# Altium PCB sensor rev.PcbDoc
Units mm, origin at the board's own origin, x right, y up, seen from the top; angles counter-clockwise.
Board outline 152.4 x 101.6 mm, 2 copper layers (Top Layer, Bottom Layer); 37 components, 41 nets, 165 pads, 0 vias.
Unrouted connection lines stored in the file: 10.
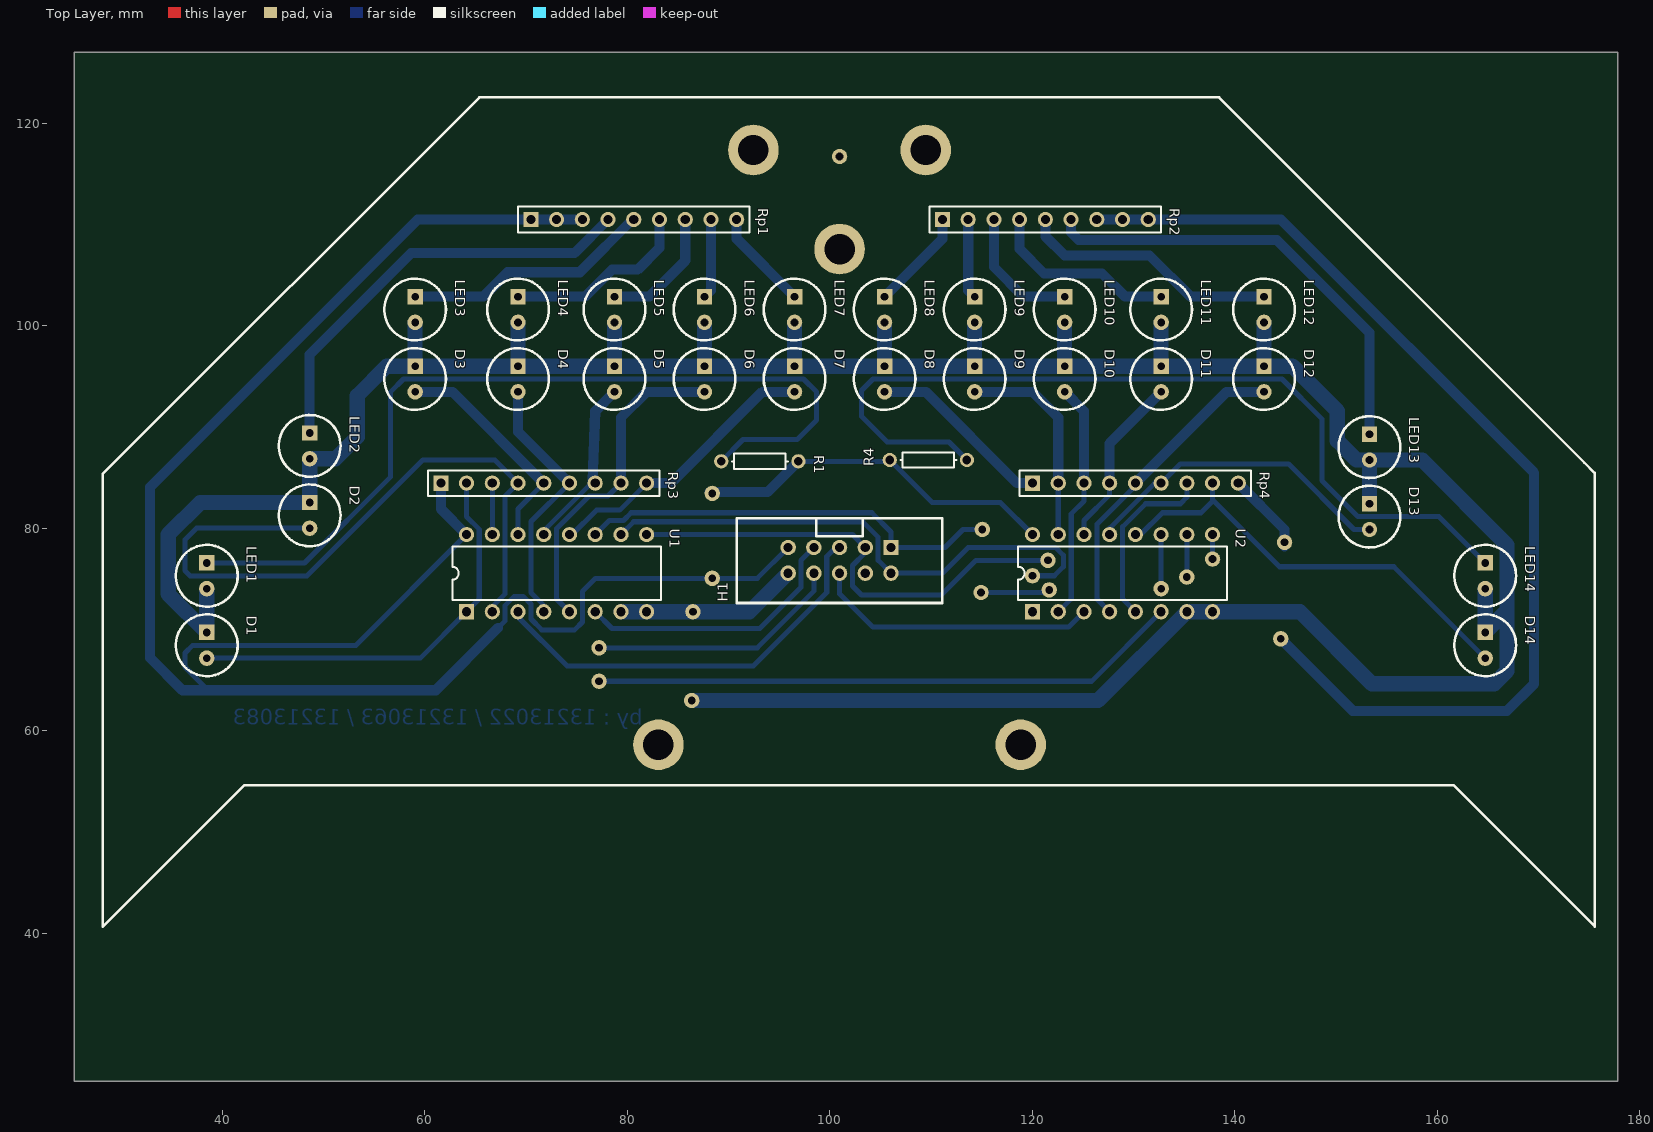
[diagram p0: Top Layer view]
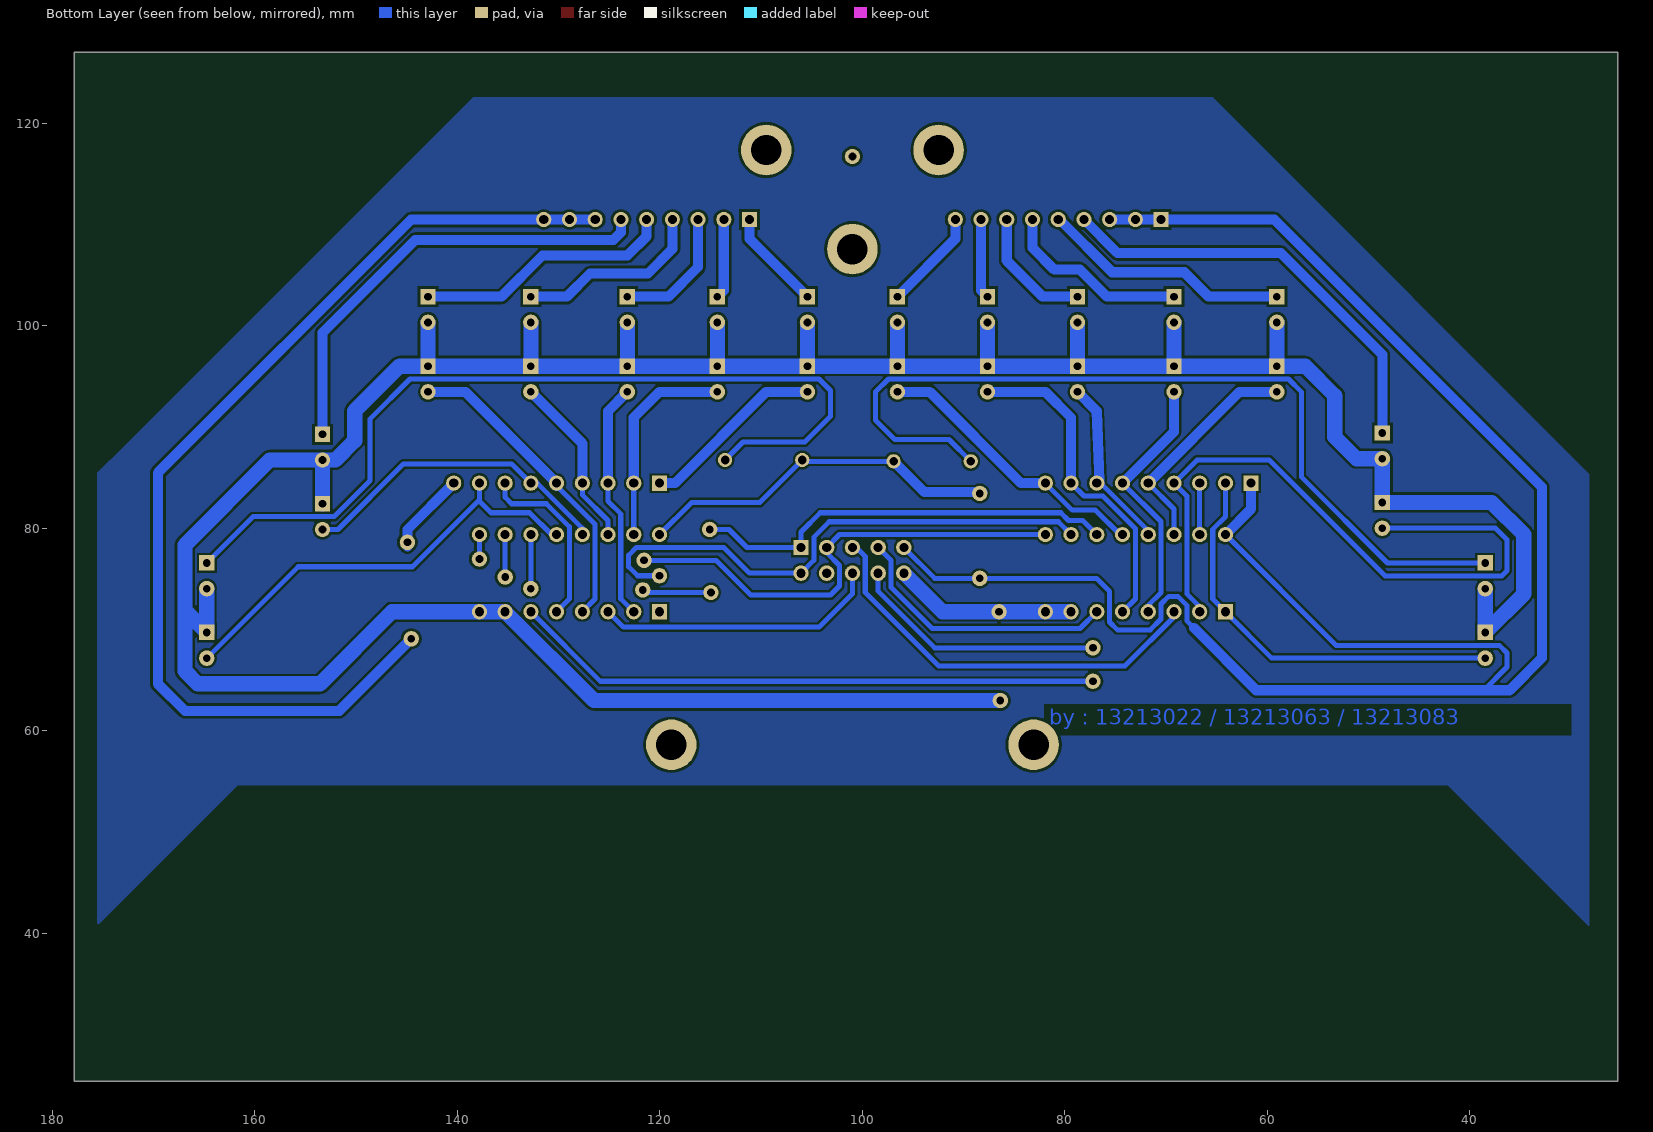
[diagram p1: Bottom Layer view, seen from below]

## Layer stack, top to bottom
Top Solder: solder mask 0.0102, Solder Resist, Dk 3.5
Top Layer: signal copper 0.0356
Dielectric1: dielectric 0.32, FR-4, Dk 4.8
Bottom Layer: signal copper 0.0356
Bottom Solder: solder mask 0.0102, Solder Resist, Dk 3.5

## Board outline
25.4,25.4 177.8,25.4 177.8,127 25.4,127

## Design rules (kind name [scope] priority, off if disabled: settings)
Clearance [All] p1: gap=0.25
PolygonConnect [All] p1: connectstyle=Relief reliefconductorwidth=0.254 reliefentries=4 polygonreliefangle="90 Angle" airgapwidth=0.254
RoomDefinition "sensor v2" [InComponentClass('sensor v2')] p1: confinementstyle=ConfineIn formatcopy=TRUE lockcomponents=FALSE outline 24.257,27.813 180.086,27.813 180.086,124.46 24.257,124.46
RoutingLayers [All] p1: top layer_v5=FALSE bottom layer_v5=TRUE
RoutingVias [All] p1: holewidth=0.711 width=1.27 viastyle="Through Hole" minholewidth=0.711 minwidth=1.27 maxholewidth=0.711 maxwidth=1.27
SilkToSolderMaskClearance SilkscreenOverComponentPads [IsPad] p1: minsilkscreentomaskgap=0.254 clearancetoexposedcopper=TRUE
SolderMaskExpansion [All] p1: expansion=0.102
Width [All] p1: maxlimit=5 minlimit=0.254 preferedwidth=0.4
28 further rules are at their usual default settings.

## Classes and differential pairs
component class "sensor v2": D2 D3 D4 D5 D6 D7 D8 D9 D10 D11 D12 D13 H1 LED2 LED3 LED4 LED5 LED6 LED7 LED8 LED9 LED10 LED11 LED12 LED13 Rp1 Rp2 Rp3 Rp4 U1 U2

## Components (designator, comment, footprint, x,y, rotation, side; value= is the part's Value field where it differs from the comment)
D1 "LED sedang" "LED sedang" 38.481,64.64 r270 top
D2 "LED sedang" "LED sedang" 48.641,77.467 r270 top (schematic designator D3)
D3 "LED sedang" "LED sedang" 59.055,90.929 r270 top (schematic designator D4)
D4 "LED sedang" "LED sedang" 69.215,90.929 r270 top (schematic designator D5)
D5 "LED sedang" "LED sedang" 78.74,90.929 r270 top (schematic designator D6)
D6 "LED sedang" "LED sedang" 87.63,90.929 r270 top (schematic designator D7)
D7 "LED sedang" "LED sedang" 96.52,90.929 r270 top (schematic designator D8)
D8 "LED sedang" "LED sedang" 105.41,90.929 r270 top (schematic designator D9)
D9 "LED sedang" "LED sedang" 114.3,90.929 r270 top (schematic designator D10)
D10 "LED sedang" "LED sedang" 123.19,90.929 r270 top (schematic designator D11)
D11 "LED sedang" "LED sedang" 132.715,90.929 r270 top (schematic designator D12)
D12 "LED sedang" "LED sedang" 142.875,90.929 r270 top (schematic designator D13)
D13 "LED sedang" "LED sedang" 153.289,77.34 r270 top (schematic designator D14)
D14 "LED sedang" "LED sedang" 164.719,64.64 r270 top (schematic designator D16)
H1 "Header Soket male 10 pin" "Header Soket male 10 pin" 103.505,80.645 r180 top
LED1 "LED sedang" "LED sedang" 38.481,71.501 r270 top
LED2 "LED sedang" "LED sedang" 48.641,84.328 r270 top (schematic designator LED3)
LED3 "LED sedang" "LED sedang" 59.055,97.79 r270 top (schematic designator LED4)
LED4 "LED sedang" "LED sedang" 69.215,97.79 r270 top (schematic designator LED5)
LED5 "LED sedang" "LED sedang" 78.74,97.79 r270 top (schematic designator LED6)
LED6 "LED sedang" "LED sedang" 87.63,97.79 r270 top (schematic designator LED7)
LED7 "LED sedang" "LED sedang" 96.52,97.79 r270 top (schematic designator LED8)
LED8 "LED sedang" "LED sedang" 105.41,97.79 r270 top (schematic designator LED9)
LED9 "LED sedang" "LED sedang" 114.3,97.79 r270 top (schematic designator LED10)
LED10 "LED sedang" "LED sedang" 123.19,97.79 r270 top (schematic designator LED11)
LED11 "LED sedang" "LED sedang" 132.715,97.79 r270 top (schematic designator LED12)
LED12 "LED sedang" "LED sedang" 142.875,97.79 r270 top (schematic designator LED13)
LED13 "LED sedang" "LED sedang" 153.289,84.201 r270 top (schematic designator LED14)
LED14 "LED sedang" "LED sedang" 164.719,71.501 r270 top (schematic designator LED16)
R1 "Res1" AXIAL-0.3 93.091,86.614 r0 top
R4 "Res1" AXIAL-0.3 109.728,86.741 r180 top
Rp1 "Header 9" HDR1X9 70.485,110.49 r0 top
Rp2 "Header 9" HDR1X9 111.125,110.49 r0 top
Rp3 "Header 9" HDR1X9 61.595,84.455 r0 top
Rp4 "Header 9" HDR1X9 120.015,84.455 r0 top
U1 "HCC4051BF" DIP16 73.025,75.565 r0 top
U2 "HCC4051BF" DIP16 128.905,75.565 r0 top

## Footprints (in the part's own frame and the unit in brackets; to place one, negate y for a bottom-side part, rotate by r counter-clockwise, add the part's x,y. Pads: shape width x height; smd on the part's side, far side on the other; paste and mask are expansions set on the pad)
AXIAL-0.3 [mm] "Axial Device, Thru-Hole; 2 Leads; 0.3 in Pin Spacing"
  round 1.4 hole 0.85: 1(-3.81,0) 2(3.81,0)
  silkscreen extent -2.77,-0.76 2.77,0.76
DIP16 [mm] "DIP; 16 Leads; Row Spacing 7.62 mm; Pitch 2.54 mm"
  rect 1.5x1.5 hole 0.9: 1(-8.89,-3.81)
  round 1.5 hole 0.9: 2(-6.35,-3.81) 3(-3.81,-3.81) 4(-1.27,-3.81) 5(1.27,-3.81) 6(3.81,-3.81) 7(6.35,-3.81) 8(8.89,-3.81) 9(8.89,3.81) 10(6.35,3.81) 11(3.81,3.81) 12(1.27,3.81) 13(-1.27,3.81) 14(-3.81,3.81) 15(-6.35,3.81) 16(-8.89,3.81)
  silkscreen extent -10.3,-2.65 10.3,2.65
HDR1X9 [mm] "Connector; Header; 9 Position"
  rect 1.5x1.5 hole 0.9: 1(0,0)
  round 1.5 hole 0.9: 2(2.54,0) 3(5.08,0) 4(7.62,0) 5(10.16,0) 6(12.7,0) 7(15.24,0) 8(17.78,0) 9(20.32,0)
  silkscreen extent -1.27,-1.27 21.59,1.27
"Header Soket male 10 pin" [mil]
  rect 60x60 hole 35.43: 1(-100,100)
  round 60 hole 35.43: 2(-100,200) 3(0,100) 4(0,200) 5(100,100) 6(100,200) 7(200,100) 8(200,200) 9(300,100) 10(300,200)
  silkscreen extent -300,-14 500,316
"LED sedang" [mil]
  rect 60x60 hole 30: 1(-200,0)
  round 60 hole 30: 2(-100,0)
  silkscreen extent -270,-120 -30,120

## Part data
R1 R4: "Resistor"
Rp1 Rp2 Rp3 Rp4: "Header, 9-Pin"
U1 U2: "Analog Multiplexer/Demultiplexer"

## Free pads (board coordinates)
  round 5 hole 3: 0(83.077,58.625) 0(118.853,58.625) 2(109.474,117.348) 3(92.456,117.348) 3(100.965,107.569)
  round 1.524 hole 0.762: 1(100.965,116.713) 4(137.795,76.962) 5(121.539,76.835) 6(135.255,75.184) 7(120.015,75.311) 8(132.715,74.041) 9(121.666,73.914) 10(114.935,73.66) 11(115.062,79.883) 12(115.062,79.883) 13(77.216,68.199) 14(77.216,68.199) 15(77.216,64.897) 16(77.216,64.897) 17(144.526,69.088) 18(144.907,78.613) 19(86.487,71.755) 20(86.36,62.992) 21(86.36,62.992) 22(88.392,83.439) 23(88.392,75.057) 24(88.392,75.057)

## Nets (pads, with @x,y where several pads share a name; then routed paths per layer and width w, separated by ;. In a path a pad name is that pad's centre, name@x,y a point inside that pad or via, vN(x,y) a via of type N, cw(c..) or ccw(c..) an arc to the next point about the centre after c; other vN are vias at no path point)
A: H1.1 pad.8 pad.9 pad.10 pad.11 pad.12 U1.11 U2.11 | length 55.9
  Bottom Layer w0.254: pad.9@121.666,73.66 pad.9@121.666,74.041
  Bottom Layer w0.5: U1.11 78.232,80.772 79.629,80.772 80.391,81.534 104.14,81.534 106.045,79.629 H1.1 111.379,78.105 113.157,79.883 pad.11@115.443,79.883 ; pad.10@114.554,73.66 pad.9@121.666,73.66 ; pad.8@132.715,73.533 U2.11
B: H1.2 pad.6 pad.7 U1.10 U2.10 | length 57.8
  Bottom Layer w0.5: U1.10 80.645,80.645 103.251,80.645 104.775,79.121 104.775,76.835 H1.2 111.125,75.565 113.665,78.105 122.301,78.105 123.063,77.343 123.063,76.2 122.174,75.311 pad.7 ; pad.6 U2.10
C: H1.3 pad.4 pad.5 U1.9 U2.9 | length 50.2
  Bottom Layer w0.5: U1.9 102.235,79.375 H1.3 103.505,77.597 102.235,76.327 102.235,74.295 103.124,73.406 110.998,73.406 114.427,76.835 pad.5 ; pad.4@137.795,76.708 U2.9
GND: D1.1 D2.1 D3.1 D4.1 D5.1 D6.1 D7.1 D8.1 D9.1 D10.1 D11.1 D12.1 D13.1 D14.1 H1.10 LED1.2 LED2.2 LED3.2 LED4.2 LED5.2 LED6.2 LED7.2 LED8.2 LED9.2 LED10.2 LED11.2 LED12.2 LED13.2 LED14.2 pad.19 pad.20 pad.21 U1.7 U1.8 U2.7 U2.8 | length 341.6
  Bottom Layer w1.5: LED1.2 D1.1 34.671,73.53 34.671,79.375 37.843,82.547 D2.1 LED2.2 51.181,86.868 53.34,89.027 53.34,93.091 56.258,96.009 D3.1 ; LED3.2 D3.1 ; LED4.2 D4.1 ; LED5.2 D5.1 ; U1.7 U1.8 92.075,71.755 H1.10 ; pad.20 126.492,62.992 U2.7 U2.8 146.431,71.755 153.543,64.643 165.608,64.643 166.878,65.913 166.878,71.879 ; LED6.2 D6.1 ; LED7.2 D7.1 ; LED8.2 D8.1 ; LED9.2 D9.1 ; LED10.2 D10.1 ; LED11.2 D11.1 ; LED12.2 D12.1 ; D13.1 LED13.2 ; LED14.2 D14.1 166.878,71.879 ; D3.1 D4.1 ; D4.1 D5.1 ; D5.1 D6.1 ; D6.1 D7.1 ; D7.1 D8.1 ; D8.1 D9.1 ; D9.1 D10.1 ; D10.1 D11.1 ; D11.1 D12.1 ; D12.1 145.672,96.009 150.114,91.567 150.114,88.646 152.019,86.741 LED13.2 ; LED13.2 158.496,86.741 166.878,78.359 166.878,71.879
INH1: H1.7 U1.6 | length 27.2
  Bottom Layer w0.5: U1.6 78.486,70.104 93.091,70.104 97.155,74.168 97.155,76.835 H1.7
INH2: H1.8 pad.13 pad.14 pad.15 pad.16 U2.6 | length 84.5
  Bottom Layer w0.5: pad.13@76.708,68.326 76.835,68.199 92.837,68.199 98.425,73.787 H1.8 ; pad.15@76.962,64.897 125.857,64.897 U2.6
IO1: H1.5 U1.3 | length 41.2
  Bottom Layer w0.5: U1.3 69.215,71.247 74.041,66.421 92.456,66.421 99.699,73.664 99.699,77.212 100.592,78.105 H1.5
IO2: H1.6 U2.3 | length 28.2
  Bottom Layer w0.5: H1.6 100.965,73.533 104.267,70.231 123.571,70.231 U2.3
NetLED1_1: LED1.1 R1.1 | length 87
  Bottom Layer w0.5: LED1.1 48.133,76.581 56.642,85.09 56.642,93.472 57.913,94.743 60.026,94.743 60.038,94.755 68.232,94.755 68.244,94.743 97.408,94.743 98.679,93.472 98.679,90.678 96.774,88.773 91.44,88.773 R1.1
NetLED2_1: 
NetLED3_1: LED2.1 Rp1.4 | length 42.7
  Bottom Layer w1: LED2.1 48.641,97.155 58.674,107.188 74.803,107.188 Rp1.4
NetLED4_1: LED3.1 Rp1.5 | length 24.7
  Bottom Layer w1: LED3.1 65.786,102.87 68.199,105.283 75.316,105.283 80.523,110.49 Rp1.5
NetLED5_1: LED4.1 Rp1.6 | length 18.8
  Bottom Layer w1: LED4.1 75.819,102.87 78.486,105.537 81.026,105.537 83.185,107.696 Rp1.6
NetLED6_1: LED5.1 Rp1.7 | length 12.5
  Bottom Layer w1: LED5.1 82.169,102.87 85.725,106.426 Rp1.7
NetLED7_1: LED6.1 Rp1.8 | length 7.9
  Bottom Layer w1: LED6.1 88.265,103.505 Rp1.8
NetLED8_1: LED7.1 Rp1.9 | length 10
  Bottom Layer w1: Rp1.9 90.805,108.585 LED7.1
NetLED9_1: LED8.1 Rp2.1 | length 10
  Bottom Layer w1: LED8.1 111.125,108.585 Rp2.1
NetLED10_1: LED9.1 Rp2.2 | length 7.9
  Bottom Layer w1: Rp2.2 113.665,103.505 LED9.1
NetLED11_1: LED10.1 Rp2.3 | length 12.9
  Bottom Layer w1: Rp2.3 116.205,105.791 119.126,102.87 LED10.1
NetLED12_1: LED11.1 Rp2.4 | length 18.8
  Bottom Layer w1: Rp2.4 118.745,107.569 121.158,105.156 126.873,105.156 129.159,102.87 LED11.1
NetLED13_1: LED12.1 Rp2.5 | length 25.7
  Bottom Layer w1: Rp2.5 121.285,108.839 123.19,106.934 131.572,106.934 135.636,102.87 LED12.1
NetLED14_1: LED13.1 Rp2.6 | length 44.9
  Bottom Layer w1: Rp2.6 123.825,109.22 124.587,108.458 144.145,108.458 153.289,99.314 LED13.1
NetLED15_1: 
NetLED16_1: LED14.1 R4.1 | length 87.9
  Bottom Layer w0.5: R4.1 111.76,88.519 105.664,88.519 103.124,91.059 103.124,93.599 104.268,94.743 133.686,94.743 133.698,94.755 141.892,94.755 141.904,94.743 144.652,94.743 148.59,90.805 148.59,84.709 152.153,81.146 160.154,81.146 LED14.1
S1: D1.2 Rp3.2 U1.1 | length 41.3
  Bottom Layer w0.5: D1.2 59.56,67.18 U1.1 65.389,73.009 65.389,79.894 64.135,81.148 Rp3.2
S2: Rp3.3 U1.15 | length 5.1
  Bottom Layer w0.5: U1.15 Rp3.3
S3: D2.2 Rp3.4 U1.2 | length 68.4
  Bottom Layer w0.5: D2.2 37.462,80.007 36.322,78.867 36.322,75.819 36.834,75.307 48.383,75.307 59.817,86.741 66.929,86.741 Rp3.4 67.945,83.185 67.945,73.533 66.675,72.263 U1.2
S4: D3.2 Rp3.5 U1.14 | length 22.6
  Bottom Layer w0.5: U1.14 69.215,81.915 Rp3.5
  Bottom Layer w1: D3.2 62.741,93.469 Rp3.5
S5: D4.2 Rp3.6 U1.4 | length 25.9
  Bottom Layer w0.5: U1.4 71.755,72.39 70.501,73.644 70.501,80.661 Rp3.6
  Bottom Layer w1: D4.2 69.215,89.535 Rp3.6
S6: D5.2 Rp3.7 U1.13 | length 16.9
  Bottom Layer w0.5: U1.13@71.501,79.502 Rp3.7@76.581,84.582
  Bottom Layer w1: Rp3.7@76.581,84.582 76.835,91.564 D5.2
S7: D6.2 Rp3.8 U1.5 | length 32.7
  Bottom Layer w0.5: U1.5 73.025,73.025 73.025,79.96 76.25,83.185 78.105,83.185 Rp3.8
  Bottom Layer w1: Rp3.8 79.375,90.932 81.912,93.469 D6.2
S8: D7.2 Rp3.9 U1.12 | length 28.1
  Bottom Layer w0.5: U1.12 74.549,79.375 76.962,81.788 79.248,81.788 Rp3.9
  Bottom Layer w1: Rp3.9 84.328,84.455 93.342,93.469 D7.2
S9: D8.2 Rp4.1 U2.1 | length 18.3
  Bottom Layer w1: D8.2 109.477,93.469 118.491,84.455 Rp4.1
S10: D9.2 Rp4.2 U2.15 | length 20.9
  Bottom Layer w0.5: U2.15 Rp4.2
  Bottom Layer w1: D9.2 120.018,93.469 122.555,90.932 Rp4.2
S11: D10.2 Rp4.3 U2.2 | length 23.6
  Bottom Layer w0.5: U2.2 123.841,73.041 123.841,81.423 125.095,82.677 Rp4.3
  Bottom Layer w1: D10.2 125.095,91.564 Rp4.3
S12: D11.2 Rp4.4 U2.14 | length 17.2
  Bottom Layer w0.5: U2.14 125.095,80.772 127.635,83.312 Rp4.4
  Bottom Layer w1: Rp4.4 127.635,88.389 D11.2
S13: D12.2 Rp4.5 U2.4 | length 31.2
  Bottom Layer w0.5: U2.4 126.381,73.009 126.381,80.407 Rp4.5@130.175,84.201
  Bottom Layer w1: Rp4.5@130.175,84.201 Rp4.5 139.189,93.469 D12.2
S14: D13.2 Rp4.6 U2.13 | length 31.6
  Bottom Layer w0.5: U2.13 127.635,80.01 132.08,84.455 Rp4.6 134.62,86.36 145.288,86.36 151.768,79.88 D13.2
S15: Rp4.7 U2.5 | length 17.9
  Bottom Layer w0.5: U2.5 128.921,73.009 128.921,80.153 131.191,82.423 134.62,82.423 135.255,83.058 Rp4.7
S16: D14.2 Rp4.8 U2.12 | length 44.2
  Bottom Layer w0.5: U2.12 130.683,79.375 132.842,81.534 136.652,81.534 137.795,82.677 137.795,82.804 ; Rp4.8 137.795,82.804 ; D14.2 155.699,76.2 144.399,76.2 137.795,82.804
VCC: H1.9 pad.17 pad.18 pad.22 pad.23 pad.24 R1.2 R4.2 Rp1.1 Rp1.2 Rp1.3 Rp2.7 Rp2.8 Rp2.9 Rp3.1 Rp4.9 U1.16 U2.16 | length 338.1
  Bottom Layer w0.5: 38.608,64.008 36.322,66.294 36.322,67.684 37.084,68.446 53.206,68.446 U1.16 ; 67.246,70.168 67.945,70.866 67.945,72.39 68.834,73.279 69.723,73.279 70.485,72.517 70.485,71.043 71.551,69.977 74.803,69.977 75.581,70.755 75.581,73.771 76.867,75.057 92.837,75.057 H1.9 ; R1.2 105.791,86.614 R4.2 110.109,82.55 116.84,82.55 U2.16
  Bottom Layer w1: Rp3.1 61.595,81.915 U1.16 ; 67.246,70.168 61.087,64.008 38.608,64.008 36.068,64.008 32.893,67.183 32.893,84.074 59.309,110.49 Rp1.1 Rp1.2 Rp1.3 ; pad.22@88.138,83.566 93.853,83.566 R1.2 ; Rp2.7 Rp2.8 Rp2.9 144.526,110.49 169.545,85.471 169.545,64.643 166.878,61.976 151.638,61.976 pad.17 ; Rp4.9 144.907,79.883 pad.18@144.907,78.232
pads on no net: H1.4

## Polygon pours and split planes (outlines as drawn)
no net on Bottom Layer "Bottom Layer-No Net" (solid, pour order 0): 28.194,85.344 28.194,40.767 28.321,40.767 42.164,54.61 52.324,54.61 161.671,54.61 161.925,54.356 175.514,40.767 175.514,85.471 172.974,88.011 138.43,122.555 132.334,122.555 65.405,122.555 63.119,120.269

## Other copper
Bottom Layer:
  text "by : 13213022 / 13213063 / 13213083" at 81.534,60.579 h1.52

## Silkscreen, mask and mechanical layers (free items; w line width, h text height)
Top Overlay:
  lines w0.254: 42.1,54.546 28.194,40.64 28.194,85.344 65.405,122.555 65.786,122.555 138.43,122.555 174.498,86.487 175.514,85.471 175.514,40.64 175.514,40.725 161.629,54.61 161.375,54.61 42.164,54.61

## Dimensions
83.077,58.625 to 118.853,58.625 on Mechanical 1